# Altium PCB MATIKPO.PcbDoc
Units mm, origin at the board's own origin, x right, y up, seen from the top; angles counter-clockwise.
Board outline 100.33 x 49.91 mm, 2 copper layers (Top Layer, Bottom Layer); 15 components, 11 nets, 37 pads, 0 vias.
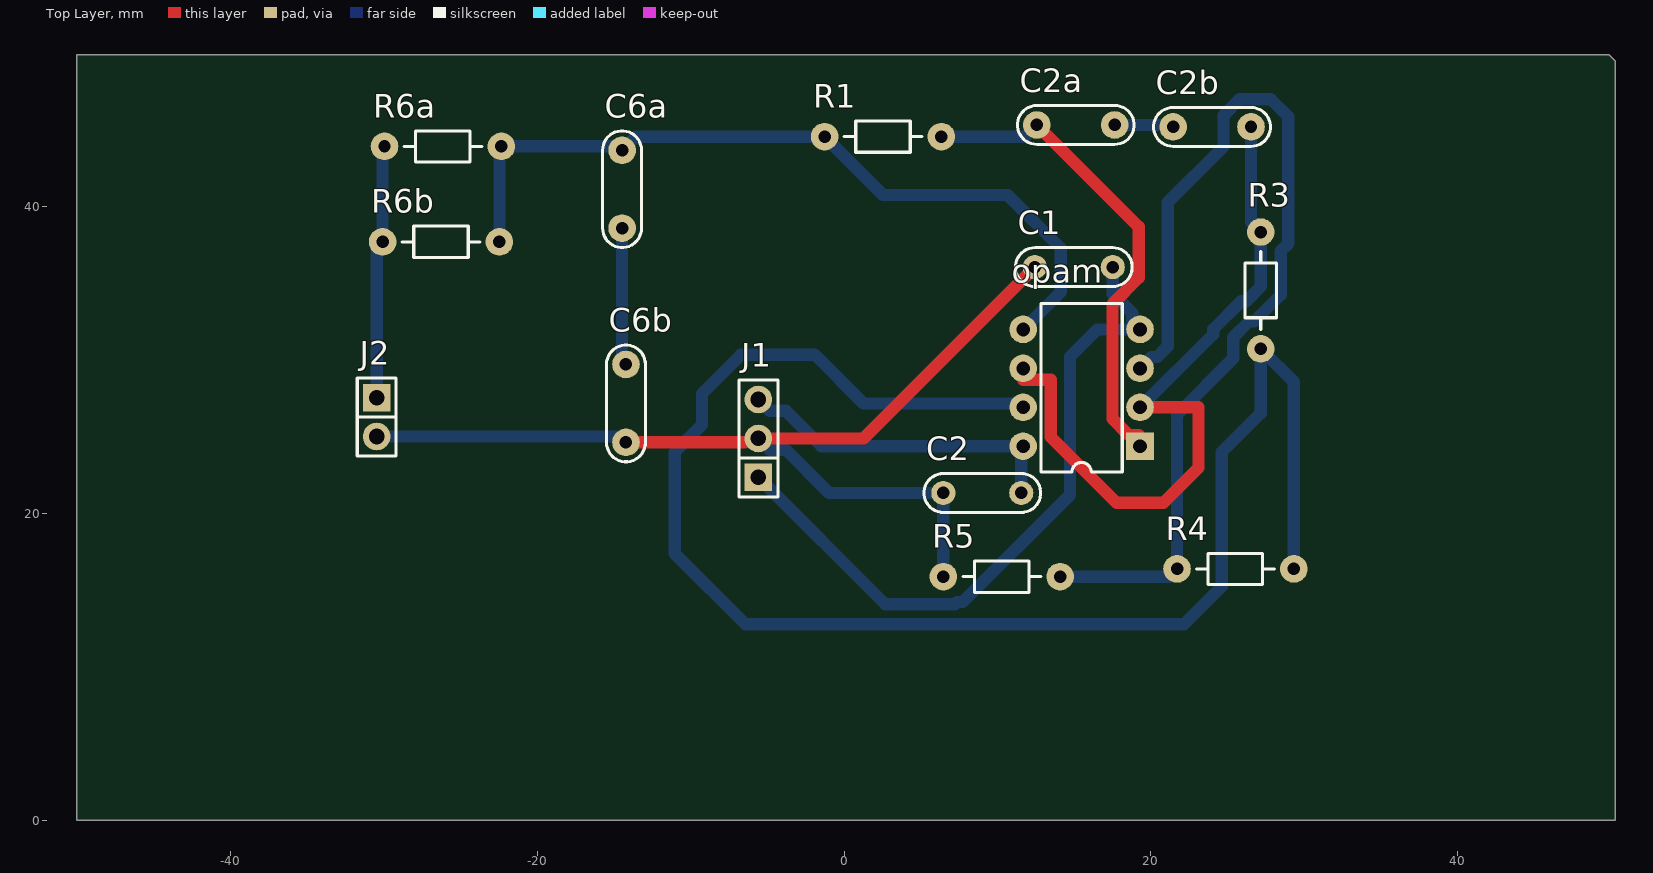
[diagram p0: Top Layer view]
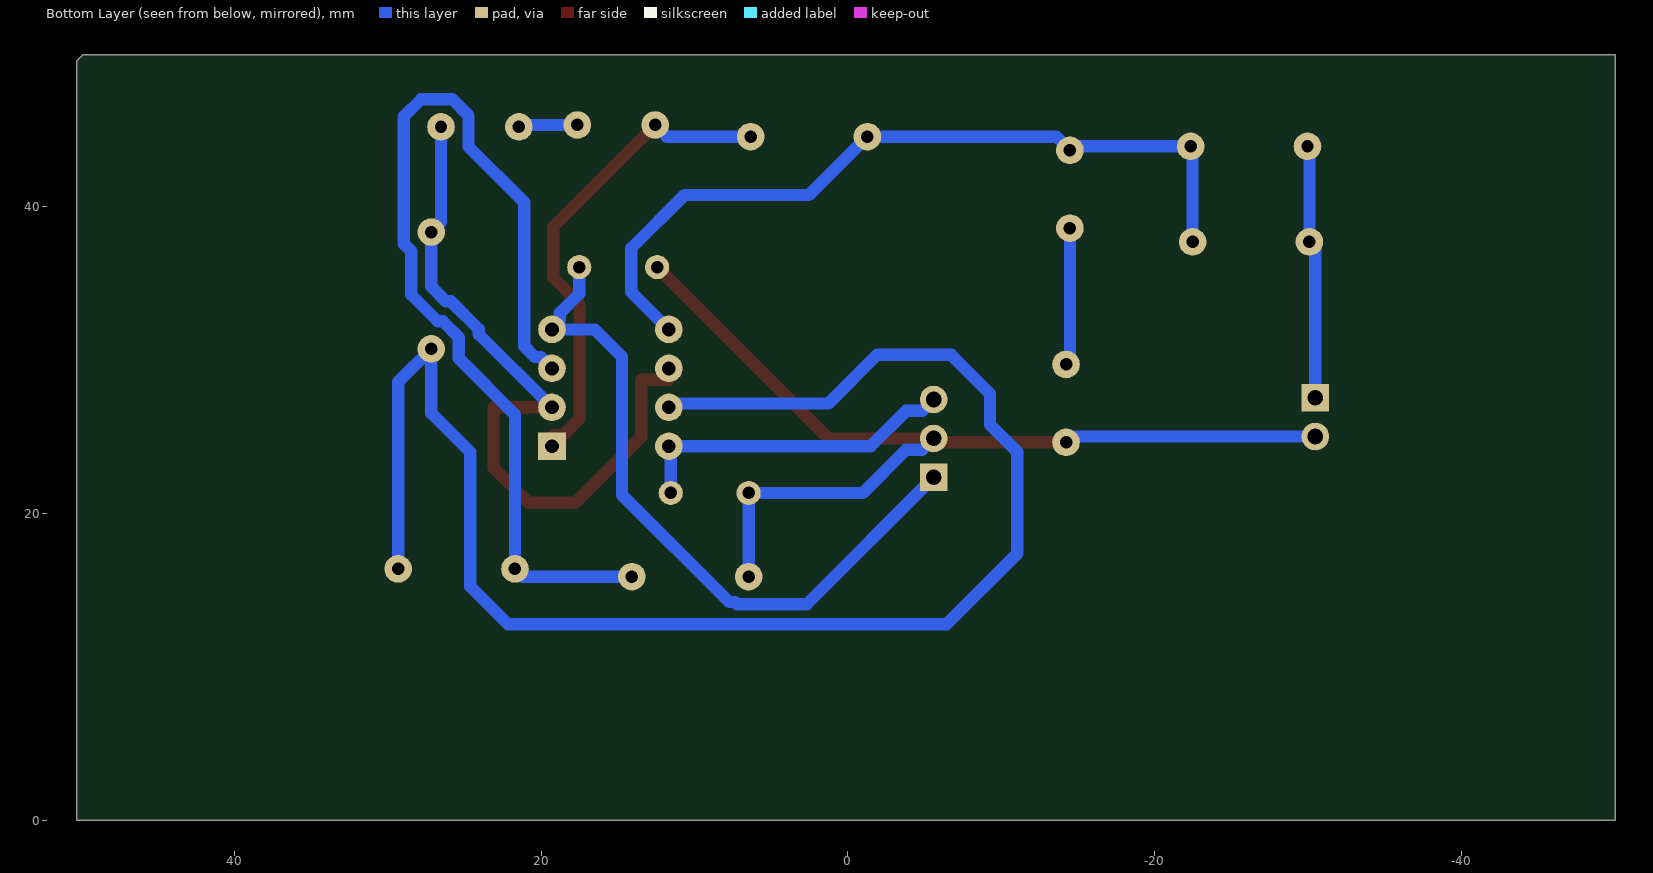
[diagram p1: Bottom Layer view, seen from below]
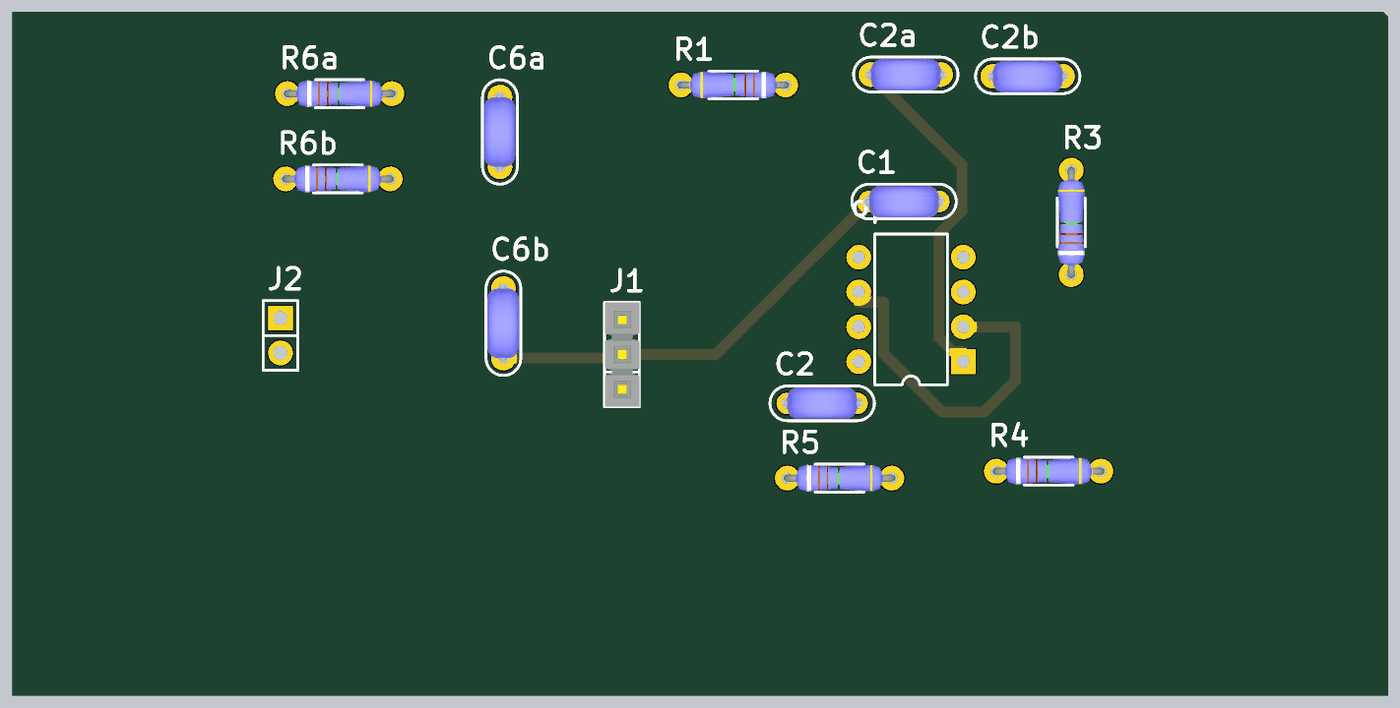
[diagram p2: 3D render of the assembled board from above, using the file's embedded part models]

## Layer stack, top to bottom
Top Solder: solder mask 0.0102, Solder Resist, Dk 3.5
Top Layer: signal copper 0.0356
Dielectric 1: dielectric 0.32, FR-4, Dk 4.8
Bottom Layer: signal copper 0.0356
Bottom Solder: solder mask 0.0102, Solder Resist, Dk 3.5

## Board outline
-50.038,0 50.292,0 50.292,49.53 49.911,49.911 -50.038,49.911

## Design rules (kind name [scope] priority, off if disabled: settings)
Clearance [All] p1: gap=0.5 ignorepadtopadclearanceinfootprint=FALSE
PolygonConnect [All] p1: connectstyle=Relief reliefconductorwidth=0.254 reliefentries=4 polygonreliefangle="90 Angle" airgapwidth=0.254
RoutingVias [All] p1: holewidth=0.711 width=2 viastyle="Through Hole" minholewidth=0.5 minwidth=1.5 maxholewidth=0.5 maxwidth=2
SolderMaskExpansion [All] p1: expansion=0.102
Width [All] p1: maxlimit=0.8 minlimit=0.8 preferedwidth=0.8
30 further rules are at their usual default settings.

## Classes and differential pairs
component class ARIKPO: C2 C2a C2b C6a C6b J2 opam R1 R3 R4 R5 R6a R6b

## Components (designator, comment, footprint, x,y, rotation, side; value= is the part's Value field where it differs from the comment)
C1 "CAP" CAP200#1 14.986,36.068 r0 top
C2 "CAP" CAP200#1 9.017,21.336 r180 top
C2a "CAP" CAP200#2 15.113,45.339 r0 top
C2b "CAP" CAP200#2 24.003,45.212 r0 top
C6a "CAP" CAP200#2 -14.478,41.148 r270 top
C6b "CAP" CAP200#2 -14.224,27.178 r270 top
J1 "CON3" SIP3 -5.588,24.892 r90 top
J2 "CON2" SIP2 -30.48,26.289 r270 top
opam "TL082ACN" DIP8 15.494,28.194 r90 top
R1 "RES" RES300 6.35,44.577 r180 top
R3 "RES" RES300 27.178,30.734 r90 top
R4 "RES" RES300 21.717,16.383 r0 top
R5 "RES" RES300 6.477,15.875 r0 top
R6a "RES" RES300 -29.972,43.942 r0 top
R6b "RES" RES300 -30.099,37.719 r0 top

## Footprints (in the part's own frame and the unit in brackets; to place one, negate y for a bottom-side part, rotate by r counter-clockwise, add the part's x,y. Pads: shape width x height; smd on the part's side, far side on the other; paste and mask are expansions set on the pad)
CAP200#1 [mil]
  round 62 hole 32: 1(-100,0) 2(100,0)
  silkscreen extent -150,-50 150,50, body extent -110,-46 110,44, height 246
CAP200#2 [mil]
  round 70.87 hole 32: 1(-100,0) 2(100,0)
  silkscreen extent -150,-50 150,50, body extent -110,-46 110,44, height 246
DIP8 [mm] "DIP; 8 Leads; Row Spacing 7.62 mm; Pitch 2.54 mm"
  rect 1.8x1.8 hole 0.9: 1(-3.81,-3.81)
  round 1.8 hole 0.9: 2(-1.27,-3.81) 3(1.27,-3.81) 4(3.81,-3.81) 5(3.81,3.81) 6(1.27,3.81) 7(-1.27,3.81) 8(-3.81,3.81)
  silkscreen extent -5.5,-2.65 5.5,2.65
RES300 [mm]
  round 1.8 hole 0.813: 1(0,0) 2(7.62,0)
  silkscreen extent 1.27,-1.02 6.35,1.02, body extent -0.25,-0.97 7.87,0.97, height 2.01
SIP2 [mm]
  rect 1.8x1.8 hole 1.016: 1(-1.27,0)
  round 1.8 hole 1.016: 2(1.27,0)
  silkscreen extent -2.54,-1.27 2.54,1.27
SIP3 [mm]
  rect 1.8x1.8 hole 1.016: 1(-2.54,0)
  round 1.8 hole 1.016: 2(0,0) 3(2.54,0)
  silkscreen extent -3.81,-1.27 3.81,1.27, body extent -3.81,-1.3 3.81,1.24, height 8.38

## Part data
opam: "General-Purpose J-FET Dual Operational Amplifier", Code_JEDEC=MO-001-AN, ComponentLink1Description="Manufacturer Link", ComponentLink1URL=http://www.st.com/, ComponentLink2Description=Datasheet, ComponentLink2URL=http://www.st.com/stonline/products/literature/ds/2300/tl082.pdf, DatasheetVersion=Jan-1999, LatestRevisionDate=06-Jun-2005, LatestRevisionNote="Stylized 3D Model Added.", PackageDescription="DIP; 8 Leads; Row Spacing 7.62 mm; Pitch 2.54 mm", PackageReference=DIP8, Published=24-Aug-2001, Publisher="Altium Limited"

## Nets (pads, with @x,y where several pads share a name; then routed paths per layer and width w, separated by ;. In a path a pad name is that pad's centre, name@x,y a point inside that pad or via, vN(x,y) a via of type N, cw(c..) or ccw(c..) an arc to the next point about the centre after c; other vN are vias at no path point)
GND: C1.1 C2.2 C6b.2 J1.2 J2.2 R5.1 | length 65.8
  Top Layer w0.8: C6b.2 -6.477,24.638 ; J1.2 1.27,24.892 C1.1
  Bottom Layer w0.8: J2.2 -14.605,25.019 C6b.2 ; J1.2 -4.848,24.152 -3.788,24.152 -0.972,21.336 C2.2 R5.1
NetC2a_1: C2a.1 opam.1 R1.1 | length 32.1
  Top Layer w0.8: C2a.1 19.213,38.699 19.213,35.369 17.504,33.66 17.504,26.178 18.558,25.124 19.213,25.124 19.213,24.475 opam.1
  Bottom Layer w0.8: R1.1 11.811,44.577 C2a.1
NetC2a_2: C2a.2 C2b.1 | length 3.9
  Bottom Layer w0.8: C2a.2 21.336,45.339 C2b.1
NetC2b_2: C2b.2 opam.2 opam.6 R3.2 | length 48.4
  Top Layer w0.8: opam.6 11.684,28.724 13.484,28.724 13.484,24.997 17.78,20.701 20.828,20.701 23.114,22.987 23.114,26.924 opam.2
  Bottom Layer w0.8: opam.2 19.31,26.924 24.078,31.692 24.078,32.018 25.894,33.834 26.214,33.834 27.178,34.798 R3.2 26.543,38.989 C2b.2
NetC6a_1: C6a.1 opam.5 R1.2 R6a.2 R6b.2 | length 52.6
  Bottom Layer w0.8: R6b.2 -22.479,43.815 R6a.2 -14.732,43.942 C6a.1 -13.589,44.577 R1.2 2.54,40.767 10.668,40.767 14.133,37.302 14.133,34.453 opam.5
NetC6a_2: C6a.2 C6b.1 | length 9
  Bottom Layer w0.8: C6a.2 -14.478,29.972 C6b.1
NetJ2_1: J2.1 R6a.1 R6b.1 | length 16.6
  Bottom Layer w0.8: J2.1 -30.48,37.338 R6b.1 -30.099,43.815 R6a.1
Netopam_3: opam.3 R4.1 R5.2 | length 64.6
  Bottom Layer w0.8: R5.2 21.209,15.875 R4.1 21.717,26.439 25.378,30.1 25.378,31.48 26.432,32.534 26.752,32.534 28.478,34.26 28.478,37.108 28.978,37.608 28.978,45.869 27.835,47.012 25.797,47.012 24.743,45.958 24.743,43.92 21.104,40.281 21.104,30.883 20.425,30.204 20.044,30.204 opam.3
Netopam_7: opam.7 R3.1 R4.2 | length 105
  Bottom Layer w0.8: opam.7 11.43,27.178 1.27,27.178 -1.905,30.353 -6.731,30.353 -9.271,27.813 -9.271,25.781 -11.049,24.003 -11.049,17.399 -6.425,12.775 22.173,12.775 24.638,15.24 24.638,24.003 27.178,26.543 R3.1 29.337,28.575 R4.2
VCC: C1.2 J1.1 opam.4 | length 45.8
  Bottom Layer w0.8: J1.1 2.689,14.075 7.223,14.075 7.372,14.224 7.747,14.224 14.732,21.209 14.732,30.226 16.51,32.004 opam.4 18.804,32.504 18.804,33.05 17.526,34.328 C1.2
VEE: C2.1 J1.3 opam.8 | length 21.6
  Bottom Layer w0.8: J1.3 -4.848,26.692 -3.788,26.692 -1.48,24.384 opam.8 11.557,24.257 C2.1